# Altium PCB Smart_MCU.PcbDoc
Units mm, origin at the board's own origin, x right, y up, seen from the top; angles counter-clockwise.
Board outline 55.6 x 47.47 mm, 4 copper layers (Top Layer, GND_layer, 3.3V_layer, Bottom Layer), stack 0.603 mm thick; 88 components, 43 nets, 255 pads, 85 vias.
Unrouted connection lines stored in the file: 3.
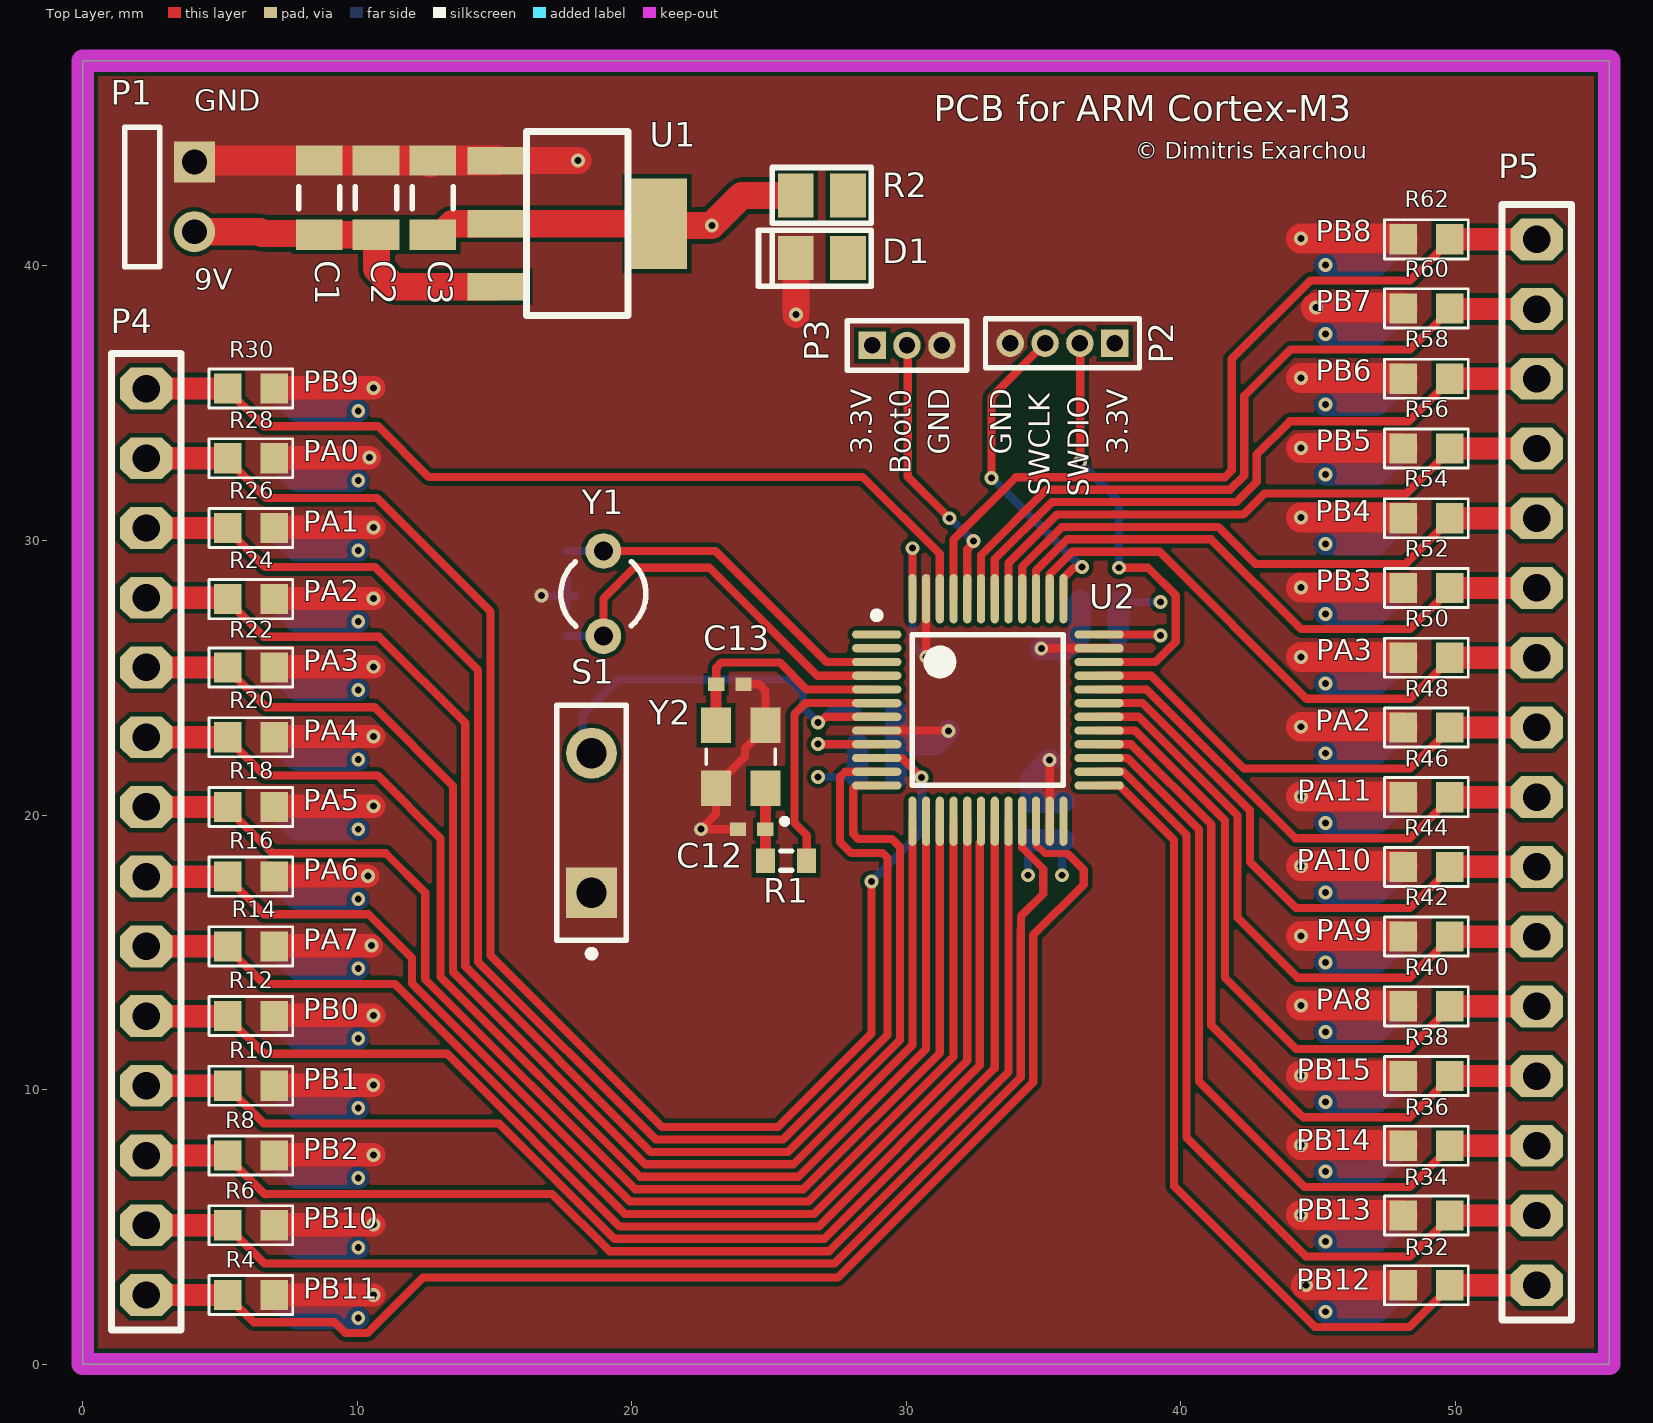
[diagram p0: Top Layer view]
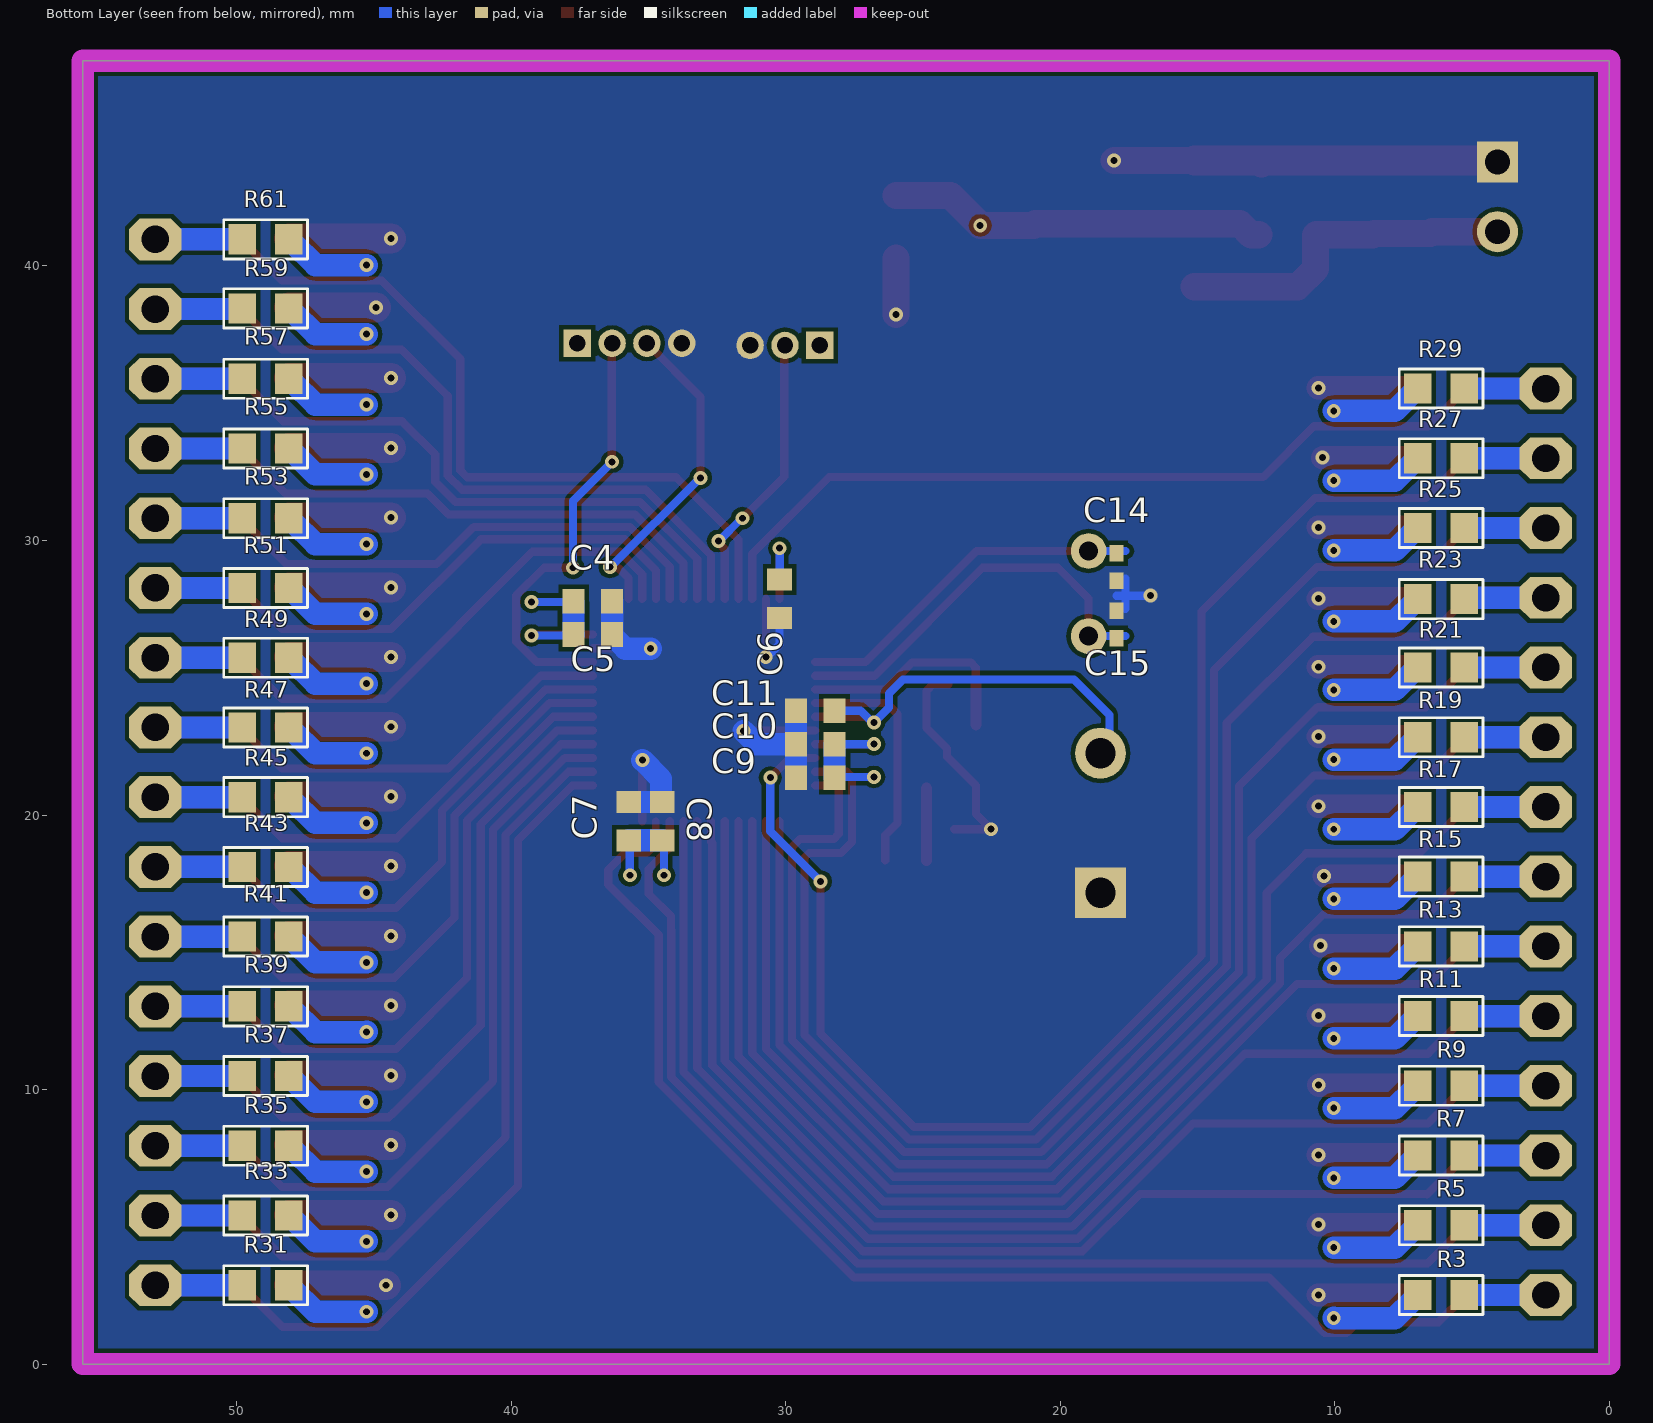
[diagram p1: Bottom Layer view, seen from below]
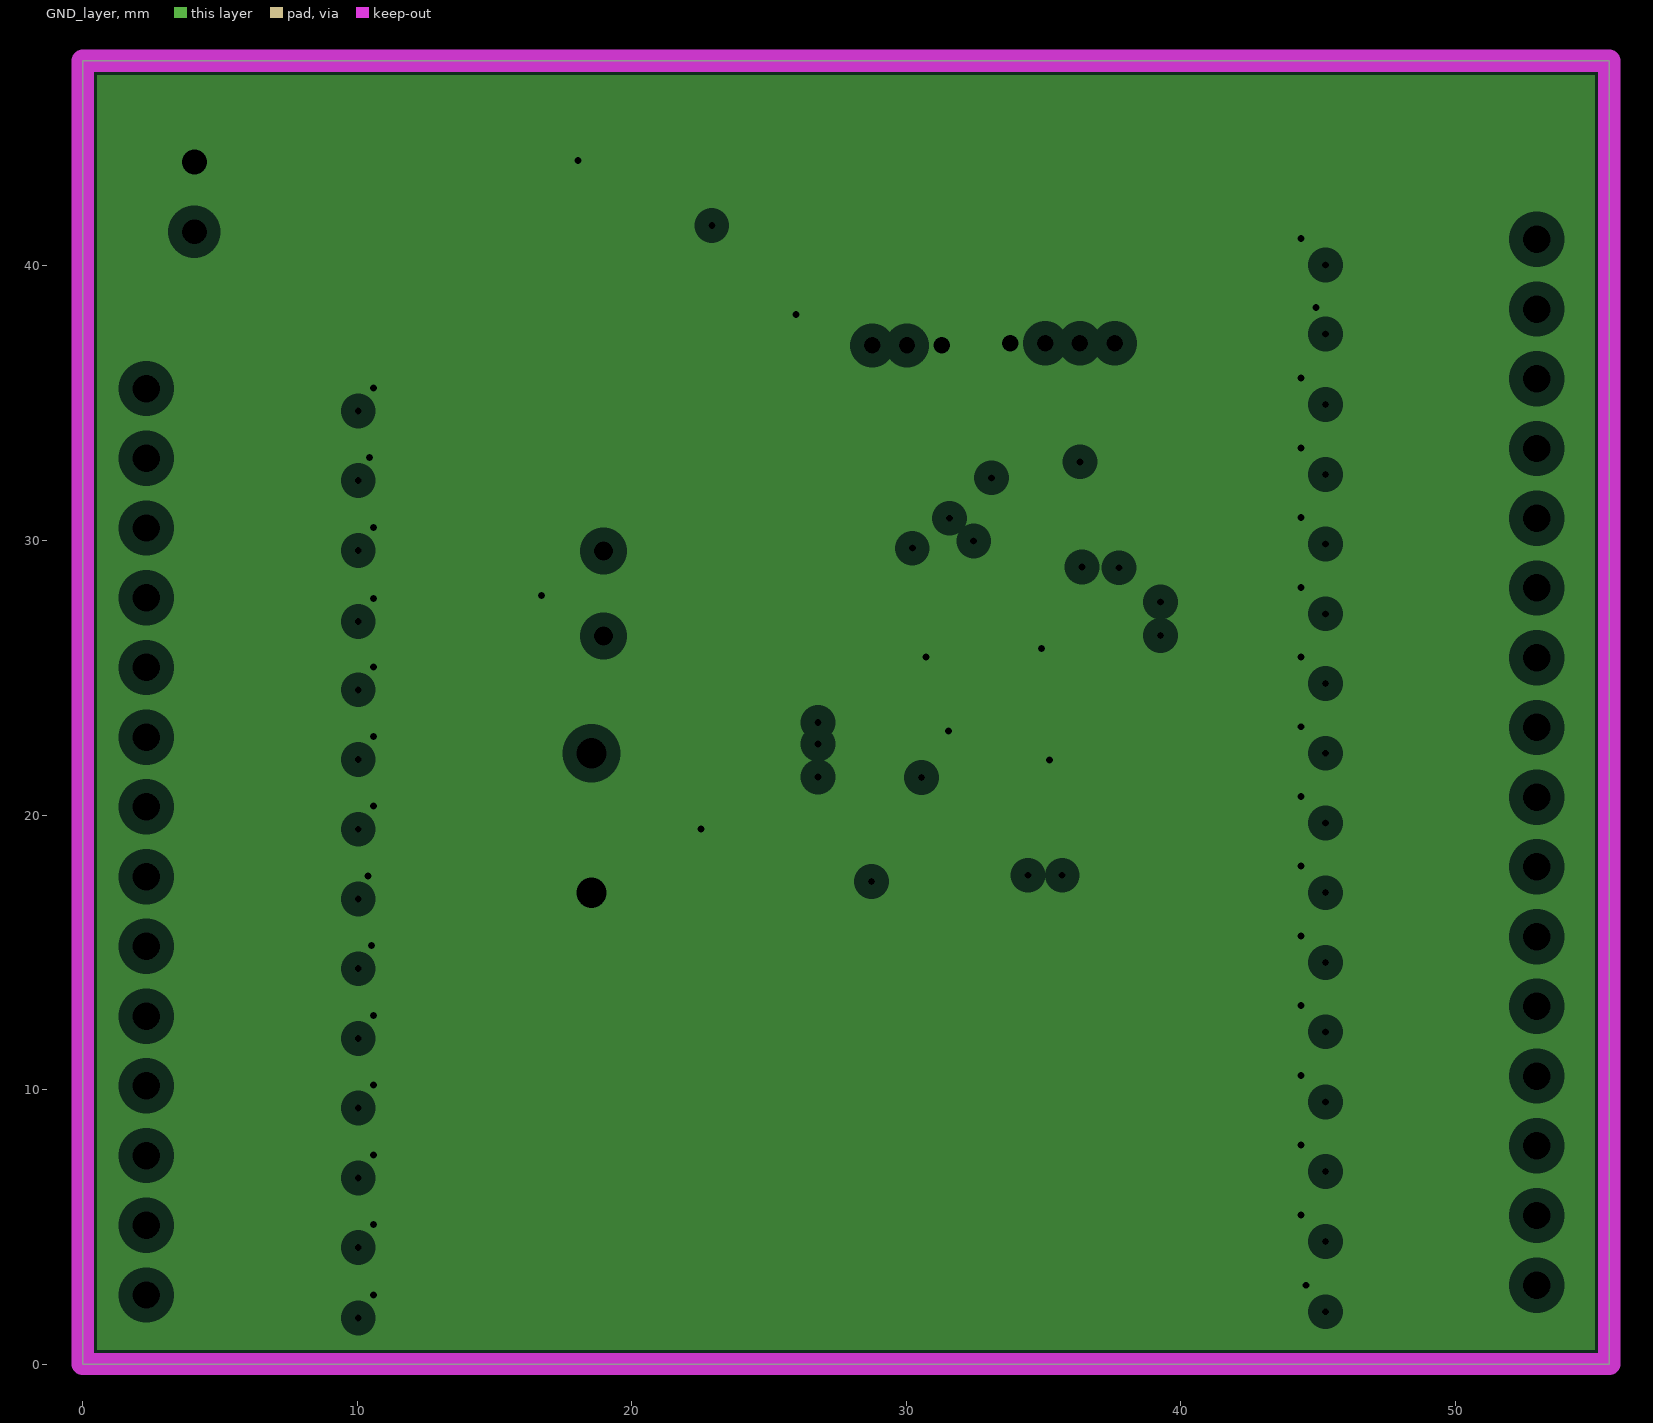
[diagram p2: GND_layer, clearances drawn from the general rule]
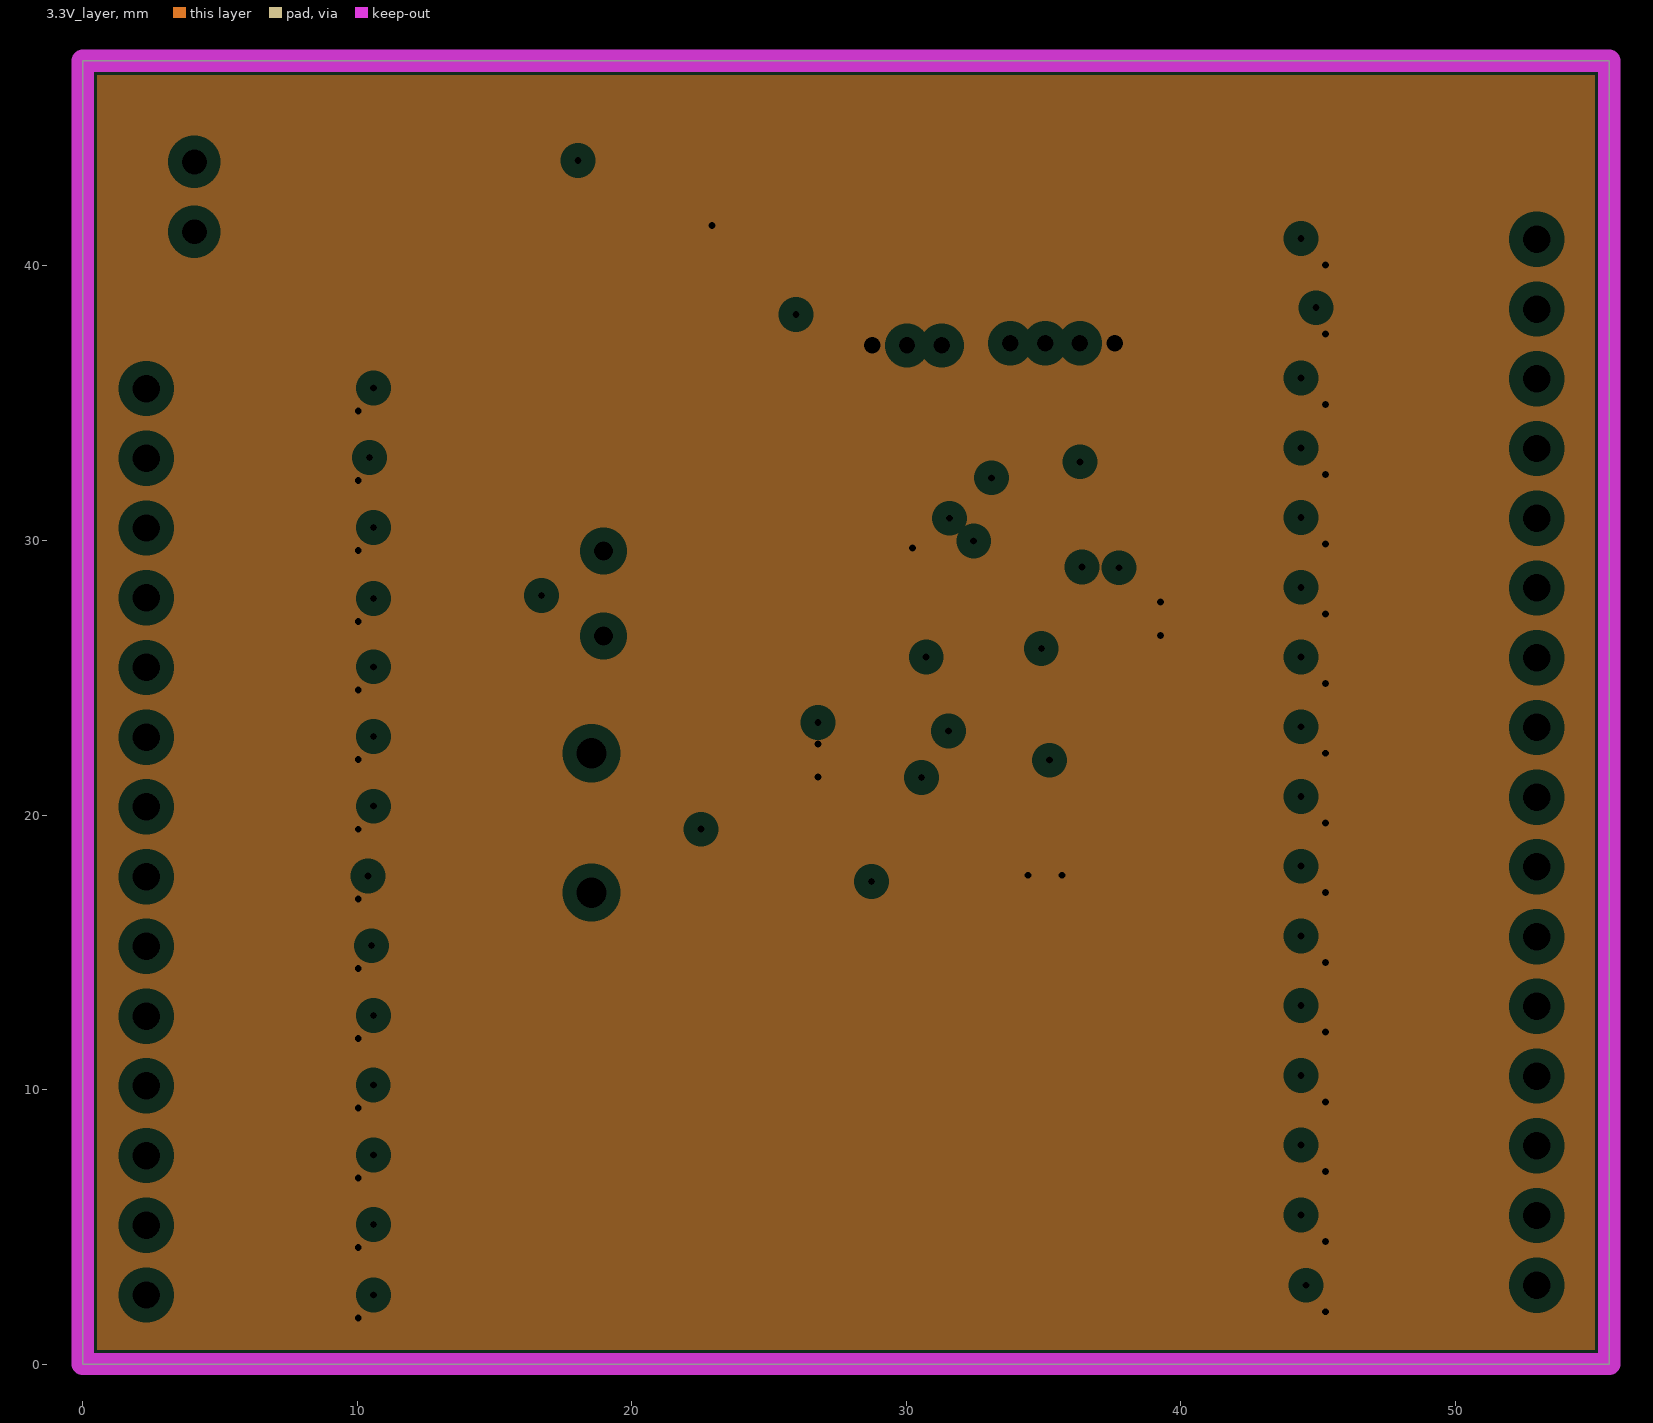
[diagram p3: 3.3V_layer, clearances drawn from the general rule]
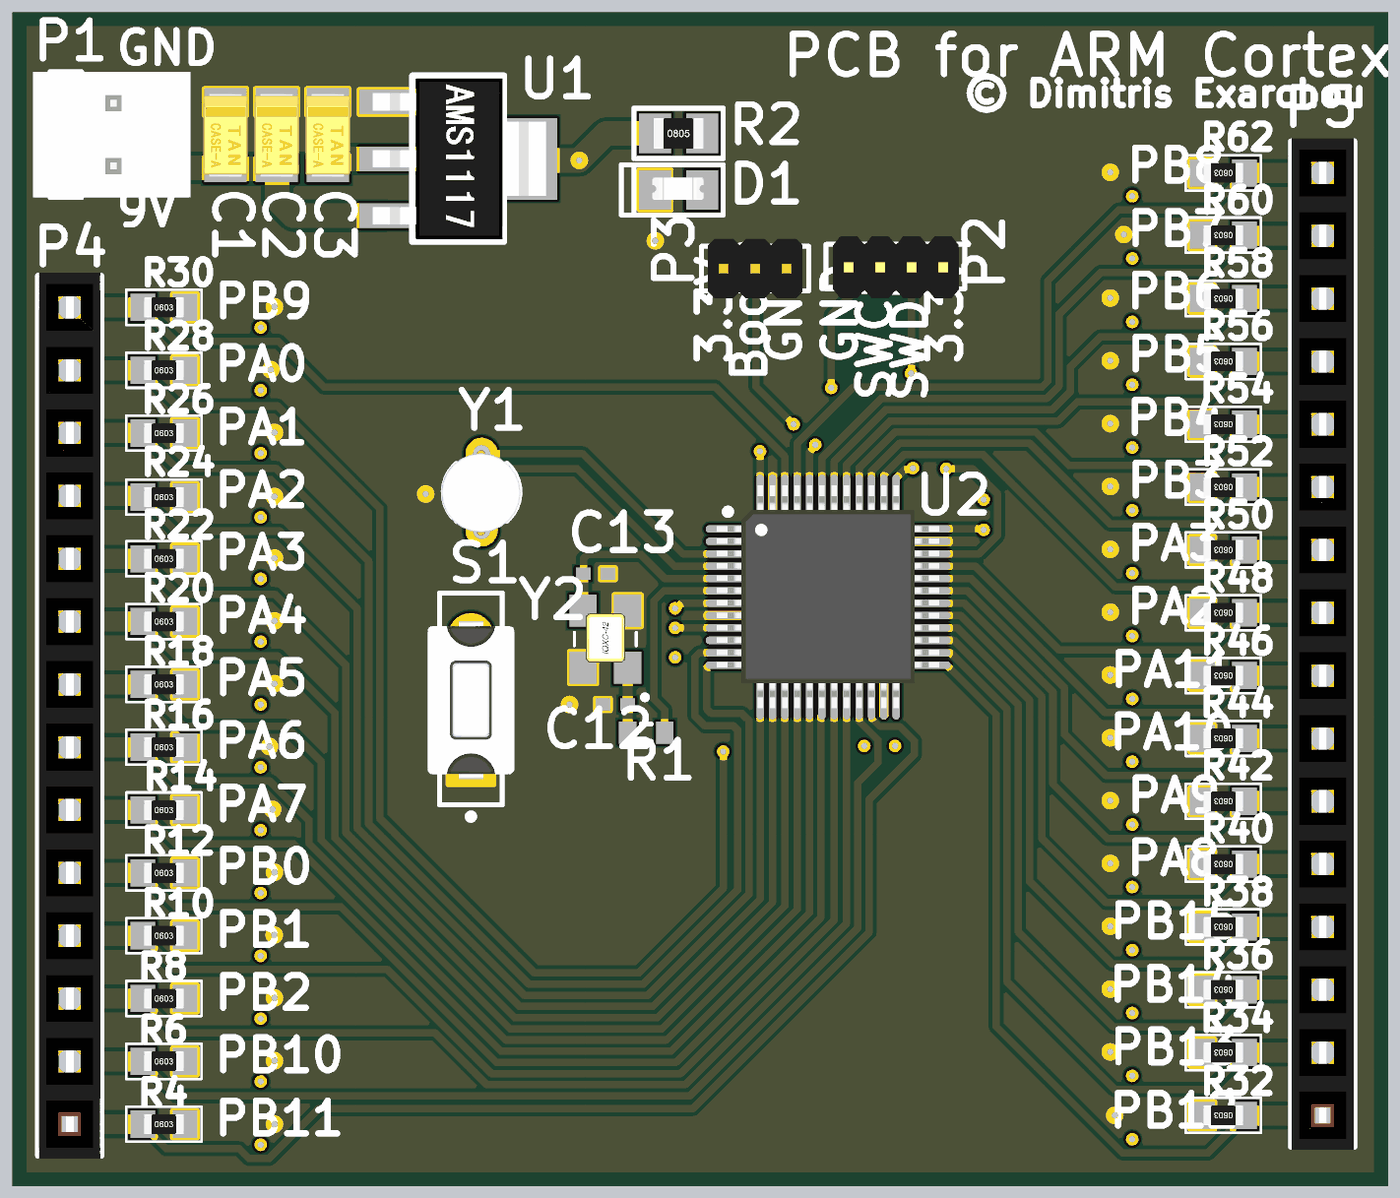
[diagram p4: 3D render of the assembled board from above, using the file's embedded part models]
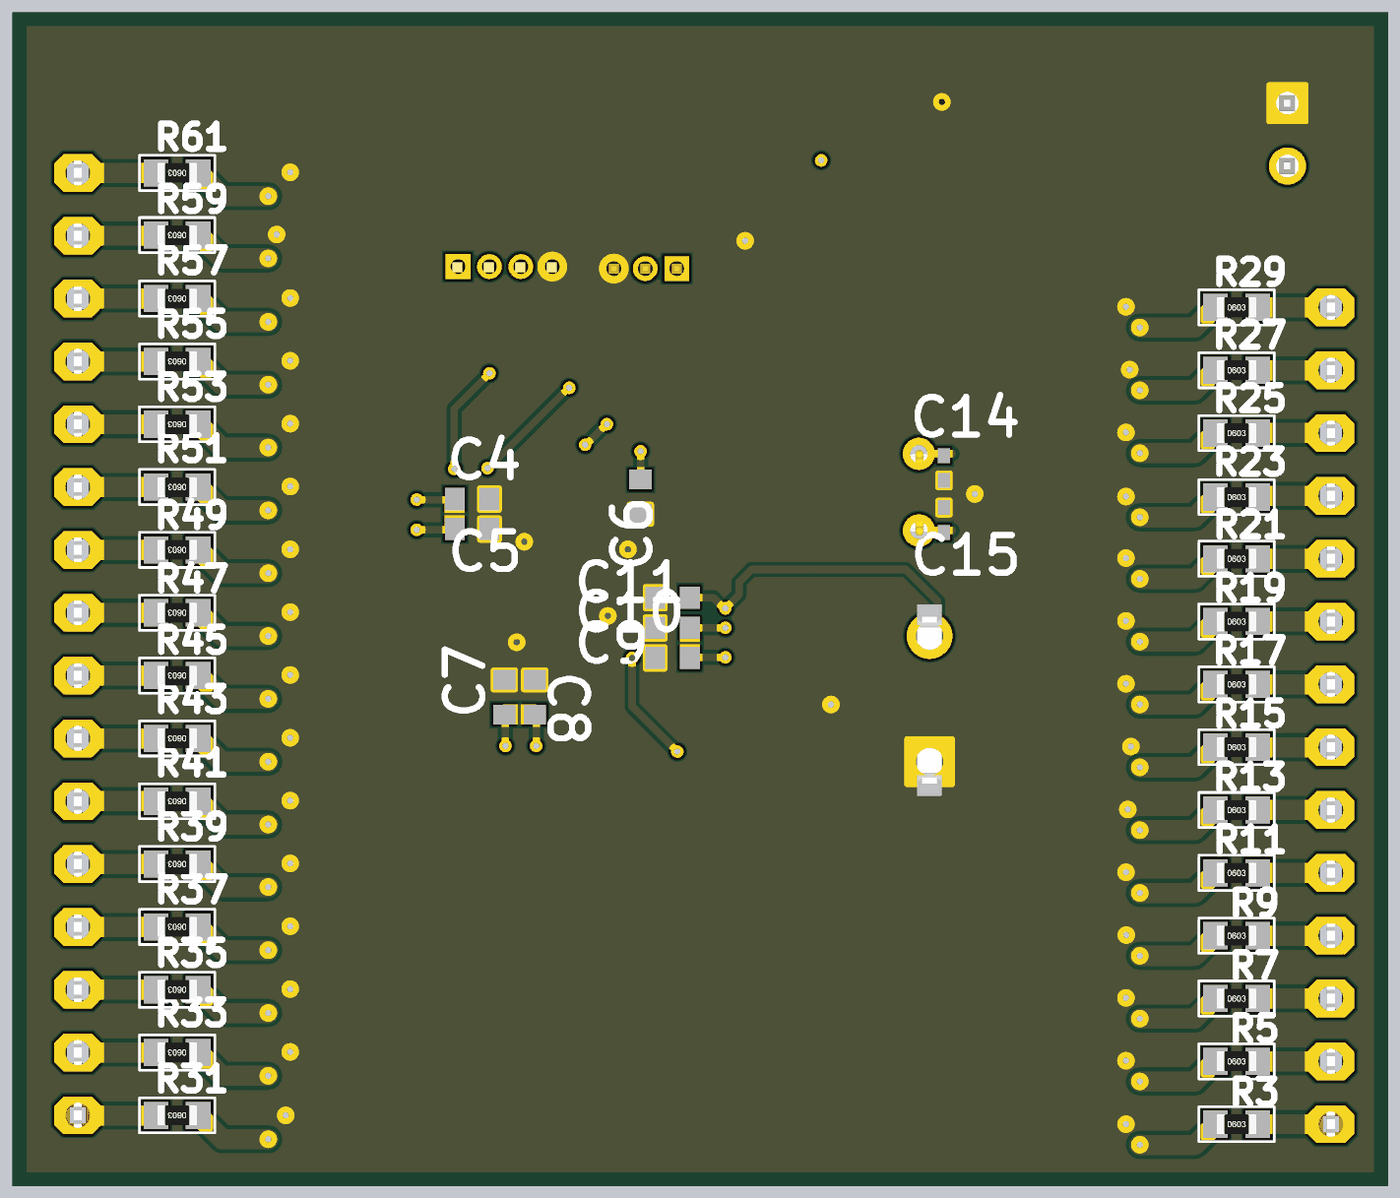
[diagram p5: 3D render of the assembled board from below, using the file's embedded part models]

## Layer stack, top to bottom
Top Solder: solder mask 0.0102, Solder Resist, Dk 3.5
Top Layer: signal copper 0.0356
Dielectric 2: prepreg 0.0711, PP-006, Dk 4.1
GND_layer: plane copper 0.035, net GND
Dielectric 1: dielectric 0.32, FR-4, Dk 4.8
3.3V_layer: plane copper 0.035, net +3.3V
Dielectric 3: prepreg 0.0711, PP-006, Dk 4.1
Bottom Layer: signal copper 0.0356
Bottom Solder: solder mask 0.0102, Solder Resist, Dk 3.5

## Board outline
0,0 0,47.473 55.601,47.473 55.601,0

## Design rules (kind name [scope] priority, off if disabled: settings)
Clearance [All] p1: gap=0.152 ignorepadtopadclearanceinfootprint=FALSE
ComponentClearance IGNORE [InComponent('Y2') vs InComponent('C12')] p1: gap=0.254 collisioncheckmode=3 verticalgap=0.254 showdistances=FALSE donotcheckwithout3dbody=TRUE
ComponentClearance ComponentClearance_1 [All] p2: gap=0.254 collisioncheckmode=3 verticalgap=0.254 showdistances=FALSE
PlaneClearance [All] p1: clearance=0.508
PlaneConnect [All] p1: planeconnectstyle=Direct reliefexpansion=0.508 reliefentries=4 reliefconductorwidth=0.254 reliefairgap=0.254
PolygonConnect [All] p1: connectstyle=Direct reliefconductorwidth=0.254 reliefentries=4 polygonreliefangle="90 Angle" airgapwidth=0.254
RoutingVias [All] p1: holewidth=0.254 width=0.508 viastyle="Through Hole" minholewidth=0.254 minwidth=0.508 maxholewidth=0.711 maxwidth=1.27
SilkToSilkClearance [All] p1: silktosilkclearance=0.102
SolderMaskExpansion [All] p1: expansion=0.102 istentingtop=FALSE
Width [All] p1: maxlimit=1.092 minlimit=0.254 preferedwidth=0.254
26 further rules are at their usual default settings.

## Classes and differential pairs
component class MCU: C4 C5 C6 C7 C8 C9 C10 C11 C12 C13 C14 C15 P2 P3 P4 P5 R1 R3 R4 R5 R6 R7 R8 R9 R10 R11 R12 R13 R14 R15 R16 R17 R18 R19 R20 R21 R22 R23 R24 R25 R26 R27 R28 R29 R30 R31 R32 R33 R34 R35 R36 R37 R38 R39 R40 R41 R42 R43 R44 R45 R46 R47 R48 R49 R50 R51 R52 R53 R54 R55 R56 R57 R58 R59 R60 R61 R62 S1 U2 Y1 Y2
component class PowerSupply: C1 C2 C3 D1 P1 R2 U1

## Components (designator, comment, footprint, x,y, rotation, side; value= is the part's Value field where it differs from the comment)
C1 "tantalum cap" C1206tancap 8.611,42.49 r270 top value=100nF
C2 "tantalum cap" C1206tancap 10.681,42.49 r270 top value=10uF
C3 "tantalum cap" C1206tancap 12.751,42.49 r270 top value=100uF
C4 "Cap Semi" 1608[0603] 37.019,27.788 r0 bottom value=100nF
C5 "Cap Semi" 1608[0603] 37.019,26.575 r0 bottom value=100nF
C6 "Cap Semi" 1608[0603] 30.219,27.875 r90 bottom value=100nF
C7 "Cap Semi" 1608[0603] 34.493,19.775 r270 bottom value=100nF
C8 "Cap Semi" 1608[0603] 35.719,19.775 r270 bottom value=4.7uF
C9 "Cap Semi" 1608[0603] 28.919,21.361 r180 bottom value=10nF
C10 "Cap Semi" 1608[0603] 28.919,22.575 r180 bottom value=1uF
C11 "Cap Semi" 1608[0603] 28.919,23.8 r180 bottom value=100nF
C12 "Cap Semi" 0402 24.366,19.482 r0 top value=10pF
C13 "Cap Semi" 0402 23.566,24.765 r180 top value=10pF
C14 "Cap Semi" 0402 17.947,29.041 r90 bottom value=10pF
C15 "Cap Semi" 0402 17.947,26.941 r270 bottom value=10pF
D1 "LED" MY_LED_0805 26.924,40.361 r0 top
P1 "Battery Connection 9V" HDR1X2H3dbody 4.064,43.79 r270 top
P2 "MHDR1X4" MHDR1X4body 37.592,37.186 r180 top
P3 "MHDR1X3" MHDR1X3body 28.753,37.105 r0 top
P4 "Header 14" MY_FE14 2.311,19.025 r90 top
P5 "Header 16" MY_FE16 52.959,21.92 r90 top
R1 "Res3" J1-0603 25.616,18.339 r0 top value=10R
R2 "330R" MY_0805 26.924,42.57 r0 top
R3 "1K" MY_0603 6.121,2.515 r180 bottom
R4 "1K" MY_0603 6.121,2.515 r0 top
R5 "1K" MY_0603 6.121,5.055 r180 bottom
R6 "1K" MY_0603 6.121,5.055 r0 top
R7 "1K" MY_0603 6.121,7.595 r180 bottom
R8 "1K" MY_0603 6.121,7.595 r0 top
R9 "1K" MY_0603 6.121,10.135 r180 bottom
R10 "1K" MY_0603 6.121,10.135 r0 top
R11 "1K" MY_0603 6.121,12.675 r180 bottom
R12 "1K" MY_0603 6.121,12.675 r0 top
R13 "1K" MY_0603 6.121,15.215 r180 bottom
R14 "1K" MY_0603 6.121,15.215 r0 top
R15 "1K" MY_0603 6.121,17.755 r180 bottom
R16 "1K" MY_0603 6.121,17.755 r0 top
R17 "1K" MY_0603 6.121,20.295 r180 bottom
R18 "1K" MY_0603 6.121,20.295 r0 top
R19 "1K" MY_0603 6.121,22.835 r180 bottom
R20 "1K" MY_0603 6.121,22.835 r0 top
R21 "1K" MY_0603 6.121,25.375 r180 bottom
R22 "1K" MY_0603 6.121,25.375 r0 top
R23 "1K" MY_0603 6.121,27.864 r180 bottom
R24 "1K" MY_0603 6.121,27.864 r0 top
R25 "1K" MY_0603 6.121,30.455 r180 bottom
R26 "1K" MY_0603 6.121,30.455 r0 top
R27 "1K" MY_0603 6.121,32.995 r180 bottom
R28 "1K" MY_0603 6.121,32.995 r0 top
R29 "1K" MY_0603 6.121,35.535 r180 bottom
R30 "1K" MY_0603 6.121,35.535 r0 top
R31 "1K" MY_0603 48.946,2.87 r0 bottom
R32 "1K" MY_0603 48.946,2.87 r180 top
R33 "1K" MY_0603 48.946,5.41 r0 bottom
R34 "1K" MY_0603 48.946,5.41 r180 top
R35 "1K" MY_0603 48.946,7.95 r0 bottom
R36 "1K" MY_0603 48.946,7.95 r180 top
R37 "1K" MY_0603 48.946,10.49 r0 bottom
R38 "1K" MY_0603 48.946,10.49 r180 top
R39 "1K" MY_0603 48.946,13.03 r0 bottom
R40 "1K" MY_0603 48.946,13.03 r180 top
R41 "1K" MY_0603 48.946,15.57 r0 bottom
R42 "1K" MY_0603 48.946,15.57 r180 top
R43 "1K" MY_0603 48.946,18.11 r0 bottom
R44 "1K" MY_0603 48.946,18.11 r180 top
R45 "1K" MY_0603 48.946,20.65 r0 bottom
R46 "1K" MY_0603 48.946,20.65 r180 top
R47 "1K" MY_0603 48.946,23.19 r0 bottom
R48 "1K" MY_0603 48.946,23.19 r180 top
R49 "1K" MY_0603 48.946,25.73 r0 bottom
R50 "1K" MY_0603 48.946,25.73 r180 top
R51 "1K" MY_0603 48.946,28.27 r0 bottom
R52 "1K" MY_0603 48.946,28.27 r180 top
R53 "1K" MY_0603 48.946,30.81 r0 bottom
R54 "1K" MY_0603 48.946,30.81 r180 top
R55 "1K" MY_0603 48.946,33.35 r0 bottom
R56 "1K" MY_0603 48.946,33.35 r180 top
R57 "1K" MY_0603 48.946,35.89 r0 bottom
R58 "1K" MY_0603 48.946,35.89 r180 top
R59 "1K" MY_0603 48.946,38.456 r0 bottom
R60 "1K" MY_0603 48.946,38.456 r180 top
R61 "1K" MY_0603 48.946,40.97 r0 bottom
R62 "1K" MY_0603 48.946,40.97 r180 top
S1 "SW-PB" SPST-2_body 18.531,19.71 r90 top
U1 "" "4-Pin SOT" 18.013,38.19 r270 top
U2 "" STM-LQFP48_N 32.969,23.825 r0 top
Y1 "XTAL" 32768 18.963,28.067 r0 top
Y2 "ECS-80-12-33-JGN-TR" 8MHZCrystall 23.966,22.123 r90 top

## Footprints (in the part's own frame and the unit in brackets; to place one, negate y for a bottom-side part, rotate by r counter-clockwise, add the part's x,y. Pads: shape width x height; smd on the part's side, far side on the other; paste and mask are expansions set on the pad)
"4-Pin SOT" [mm]
  rect 1x2.2 smd: 0(-1.05,-2.9) 1(-5.65,-2.9) 2(-3.35,-2.9)
  rect 3.3x2.2 smd: 2(-3.35,2.9)
  silkscreen extent -6.71,-1.85 0,1.85, body extent -6.6,-3.45 -0.1,3.55, height 1.61
8MHZCrystall [mm]
  rect 1.3x1.1 smd: 1(-1.15,-0.9) 2(1.15,-0.9) 3(1.15,0.9) 4(-1.15,0.9)
  silkscreen extent -2.45,-1.7 0.27,1.25, body extent -0.95,-0.8 1.05,0.8, height 0.49
0402 [mm] "Chip Capacitor, Body 1.0x0.5mm, IPC High Density"
  rect 0.6x0.5 smd: 1(-0.5,0) 2(0.5,0)
  body extent -0.55,-0.3 0.55,0.3, height 1.3
1608[0603] [mm] "Chip Capacitor, Body 1.6x0.8mm, IPC High Density"
  rect 0.8x0.9 smd: 1(-0.7,0) 2(0.7,0)
  body extent -0.87,-0.48 0.87,0.48, height 1.3
32768 [mm]
  round 1.3 hole 0.7: 1(0,1.55) 2(0,-1.55)
  silkscreen extent -1.55,-1.19 1.55,1.17, body extent -1.63,-1.75 1.57,1.7, height 9.54
C1206tancap [mm]
  rect 1.1x1.7 smd: 1(-1.35,0) 2(1.35,0)
  silkscreen extent -0.4,-0.75 0.4,0.75, body extent -1.7,-0.9 1.7,0.9, height 1.8
HDR1X2H3dbody [mm]
  rect 1.5x1.5 hole 0.9: 1(0,0)
  round 1.5 hole 0.9: 2(2.54,0)
  silkscreen extent -1.27,-2.54 3.81,-1.27, body extent -1.27,-3.23 3.81,3.12, height 11.19
J1-0603 [mm] "Chip Resistor, Body 1.6x0.8mm, IPC High Density"
  rect 0.7x0.9 smd: 1(-0.75,0) 2(0.75,0)
  silkscreen extent -0.2,-0.35 0.2,0.35, body extent -0.85,-0.48 0.85,0.48, height 0.9
MHDR1X3body [mm]
  rect 1x1 hole 0.6: 1(0,0)
  round 1 hole 0.6: 2(1.27,0) 3(2.54,0)
  silkscreen extent -0.9,-0.9 3.44,0.9, body extent -0.64,-1.2 3.17,1.2, height 5
MHDR1X4body [mm]
  rect 1x1 hole 0.6: 1(0,0)
  round 1 hole 0.6: 2(1.27,0) 3(2.54,0) 4(3.81,0)
  silkscreen extent -0.9,-0.9 4.71,0.9, body extent -0.66,-1.22 4.42,1.28, height 4.61
MY_0603 [mm]
  rect 1x1.1 smd: 1(-0.85,0) 2(0.85,0)
  silkscreen extent -1.52,-0.71 1.52,0.71, body extent -0.8,-0.4 0.8,0.4, height 0.44
MY_0805 [mm]
  rect 1.3x1.6 smd: 1(-0.95,0) 2(0.95,0)
  silkscreen extent -1.8,-1.02 1.8,1.02, body extent -1,-0.62 1,0.63, height 0.59
MY_FE14 [mm]
  oct 1.524x1.905 hole 1: 1(-16.51,0) 2(-13.97,0) 3(-11.43,0) 4(-8.89,0) 5(-6.35,0) 6(-3.81,0) 7(-1.27,0) 8(1.27,0) 9(3.81,0) 10(6.35,0) 11(8.89,0) 12(11.43,0) 13(13.97,0) 14(16.51,0)
  silkscreen extent -17.78,-1.27 17.78,1.27, body extent -17.9,-1.25 17.91,1.25, height 8.5
MY_FE16 [mm]
  oct 1.524x1.905 hole 1: 1(-19.05,0) 2(-16.51,0) 3(-13.97,0) 4(-11.43,0) 5(-8.89,0) 6(-6.35,0) 7(-3.81,0) 8(-1.27,0) 9(1.27,0) 10(3.81,0) 11(6.35,0) 12(8.89,0) 13(11.43,0) 14(13.97,0) 15(16.51,0) 16(19.05,0)
  silkscreen extent -20.32,-1.27 20.32,1.27, body extent -20.44,-1.25 20.45,1.25, height 8.5
MY_LED_0805 [mm]
  rect 1.3x1.6 smd: A(0.95,-0.076) K(-0.95,-0.076)
  silkscreen extent -2.31,-1.09 1.8,0.94, body extent -1.06,-0.48 1.01,0.42, height 0.86
SPST-2_body [mm]
  rect 1.85x1.85 hole 1.1: 1(-2.54,0)
  round 1.85 hole 1.1: 2(2.54,0)
  silkscreen extent -4.89,-1.27 4.28,1.27, body extent -3.93,-1.75 3.83,1.75, height 5.25
STM-LQFP48_N [mm]
  oval 1.8x0.3 smd: 1(-4.05,2.75) 2(-4.05,2.25) 3(-4.05,1.75) 4(-4.05,1.25) 5(-4.05,0.75) 6(-4.05,0.25) 7(-4.05,-0.25) 8(-4.05,-0.75) 9(-4.05,-1.25) 10(-4.05,-1.75) 11(-4.05,-2.25) 12(-4.05,-2.75) 25(4.05,-2.75) 26(4.05,-2.25) 27(4.05,-1.75) 28(4.05,-1.25) 29(4.05,-0.75) 30(4.05,-0.25) 31(4.05,0.25) 32(4.05,0.75) 33(4.05,1.25) 34(4.05,1.75) 35(4.05,2.25) 36(4.05,2.75)
  oval 0.3x1.8 smd: 13(-2.75,-4.05) 14(-2.25,-4.05) 15(-1.75,-4.05) 16(-1.25,-4.05) 17(-0.75,-4.05) 18(-0.25,-4.05) 19(0.25,-4.05) 20(0.75,-4.05) 21(1.25,-4.05) 22(1.75,-4.05) 23(2.25,-4.05) 24(2.75,-4.05) 37(2.75,4.05) 38(2.25,4.05) 39(1.75,4.05) 40(1.25,4.05) 41(0.75,4.05) 42(0.25,4.05) 43(-0.25,4.05) 44(-0.75,4.05) 45(-1.25,4.05) 46(-1.75,4.05) 47(-2.25,4.05) 48(-2.75,4.05)
  silkscreen extent -4.17,-2.75 2.75,3.57, body extent -4.5,-4.49 4.5,4.51, height 1.56

## Part data
C1 C3: library part "Cap Semi_6", "Capacitor (Semiconductor SIM Model)", LatestRevisionDate=29-May-2009, LatestRevisionNote="IPC-7351 Footprint Added.", PackageDescription="Chip Capacitor", PackageReference=C1206, Published=8-Jun-2000, Publisher="Altium Limited"
C2: library part "Cap Semi_5", "Capacitor (Semiconductor SIM Model)", LatestRevisionDate=29-May-2009, LatestRevisionNote="IPC-7351 Footprint Added.", PackageDescription="Chip Capacitor", PackageReference=C1206, Published=8-Jun-2000, Publisher="Altium Limited"
C4 C5 C6 C7 C8 C9 C10 C11 C12 C13 C14 C15: "Capacitor (Semiconductor SIM Model)", LatestRevisionDate=29-May-2009, LatestRevisionNote="IPC-7351 Footprint Added.", PackageDescription="Chip Capacitor", PackageReference=C1206, Published=8-Jun-2000, Publisher="Altium Limited"
D1: "Typical INFRARED GaAs LED", ASiD Part Number=LED-AS
P1: library part "Header 2H", "Header, 2-Pin, Right Angle", Voltage=9V, LatestRevisionDate=17-Jul-2002, LatestRevisionNote="Re-released for DXP Platform.", Publisher="Altium Limited"
P2: "Header, 4-Pin", LatestRevisionDate=17-Jul-2002, LatestRevisionNote="Re-released for DXP Platform.", Publisher="Altium Limited"
P3: "Header, 3-Pin", LatestRevisionDate=17-Jul-2002, LatestRevisionNote="Re-released for DXP Platform.", Publisher="Altium Limited"
P4: "Header, 14-Pin", ASiD Part Number="Header 14-AS"
P5: "Header, 16-Pin", ASiD Part Number="Header 16-AS"
R1: "Resistor", LatestRevisionDate=29-May-2009, LatestRevisionNote="IPC-7351 Footprint Added.", PackageDescription="Chip Resistor", PackageReference=J1-0603, Published=8-Jun-2000, Publisher="Altium Limited"
R2 R3 R4 R5 R6 R7 R8 R9 R10 R11 R12 R13 R14 R15 R16 R17 R18 R19 R20 R21 R22 R23 R24 R25 R26 R27 R28 R29 R30 R31 R32 R33 R34 R35 R36 R37 R38 R39 R40 R41 R42 R43 R44 R45 R46 R47 R48 R49 R50 R51 R52 R53 R54 R55 R56 R57 R58 R59 R60 R61 R62: library part Res, "Standard resistor", ASiD Part Number=Res-AS
S1: "Switch", LatestRevisionDate=17-Jul-2002, LatestRevisionNote="Re-released for DXP Platform.", PackageDescription="Switch; 2 Leads", PackageReference=SPST-2, Published=24-Mar-1999, Publisher="Altium Limited"
U1: library part lm1117, "The LM1117 is a low dropout voltage regulator with a dropout of 1.2 V at 800 mA of load current. The LM1117 is available in an adjustable version, which can set the output voltage from 1.25 V to 13.8 V with only two external resistors. In addition, the device is available in five fixed voltages, 1.8 V, 2.5 V, 3.3 V, and 5 V. The LM1117 offers current limiting and thermal shutdown. The circuit includes a Zener trimmed bandgap reference to assure output voltage accuracy to within ±1%. A minimum of 10-μF tantalum capacitor is required at the output to improve the transient response and stability.", Output Voltage=3.3V, ComponentLink1Description=datasheet, ComponentLink1URL=https://www.ti.com/lit/ds/symlink/lm1117.pdf?ts=1680684089578
U2: library part STM32F103C8T6, "ARM Cortex-M3 32-bit MCU, 64 KB Flash, 20 KB Internal RAM, 37 I/Os, 48-pin LQFP, -40 to 85 degC, Tray", I/Os (High Current)=37, Operating Frequency(F) (Processor speed) (MHz)=72, Supplier Part Number 1=497-6063-ND, Supply Voltage(Vcc) min (V)=2, A/D Converter="2x12-bit (10 Channel)", ComponentLink1Description="Manufacturer URL", ComponentLink1URL=http://www.st.com/web/en/home.html, ComponentLink2Description=Datasheet, ComponentLink2URL=http://www.st.com/st-web-ui/static/active/en/resource/technical/document/datasheet/CD00161566.pdf, ComponentLink3Description="Package Specification", ComponentLink3URL=http://www.st.com/st-web-ui/static/active/en/resource/technical/document/datasheet/DM00058181.pdf, Core="ARM Cortex-M3", DatasheetVersion="Rev. 16", FLASH Size (Prog) (kB)=64, Internal RAM Size (kB)=20, Mounting Technology="Surface Mount", PackageDescription="48-Pin Low Profile Quad Flat Package, 7 x 7 mm Body, 0.5 mm Pitch", PackageReference=LQFP48, PackageVersion="Rev. 6, 06/2013", Packing=Tray, PartNumber=STM32F103C8T6, Supplier 1=Digi-Key, Supplier 2=Farnell, Supplier 3=Newark, Supplier 4=Newark, Supplier 5=Mouser, Supplier Part Number 2=1447637, Supplier Part Number 3=59M2182, Supplier Part Number 4=57P1222, Supplier Part Number 5=511-STM32F103C8T6
Y1: "Crystal Oscillator", LatestRevisionDate=17-Jul-2002, LatestRevisionNote="Re-released for DXP Platform.", PackageDescription="Crystal, Thru-Hole; 2 Leads; Body 3.1 x 8.2 mm (Dia.xH)", PackageReference=R38, Published=8-Jun-2000, Publisher="Altium Limited"
Y2: "8MHz Â±20ppm Crystal 12pF 400 Ohms 4-SMD, No Lead", Package="SMD-4 ECS International", Availability=Warning, BuyPart=https://www.snapeda.com/parts/ECS-80-12-33-JGN-TR/ECS%20Inc./view-part/4477300/?ref=eda, MF="ECS Inc.", Mouser-Purchase-URL=https://snapeda.com/shop?store=Mouser&id=4477300, MP=ECS-80-12-33-JGN-TR, Price=None, SnapEDA_Link=https://www.snapeda.com/parts/ECS-80-12-33-JGN-TR/ECS%20Inc./view-part/4477300/?ref=snap

## Via types
v1: diameter 0.508, hole 0.254, Top Layer to Bottom Layer, 85 vias

## Nets (pads, with @x,y where several pads share a name; then routed paths per layer and width w, separated by ;. In a path a pad name is that pad's centre, name@x,y a point inside that pad or via, vN(x,y) a via of type N, cw(c..) or ccw(c..) an arc to the next point about the centre after c; other vN are vias at no path point)
"32KHz 01": C14.2 U2.3 Y1.1 | length 13
  Top Layer w0.3: Y1.1 23.051,29.617 27.093,25.575 U2.3
  Bottom Layer w0.3: 17.616,29.617 Y1.1
"32KHz 02": C15.2 U2.4 Y1.2 | length 14.8
  Top Layer w0.3: Y1.2 18.963,27.889 20.08,29.007 22.823,29.007 26.76,25.07 27.564,25.07 27.57,25.075 U2.4@28.919,25.075
  Bottom Layer w0.3: 17.616,26.517 Y1.2
+3.3V: C3.2 C4.2 C5.2 C6.2 C7.2 C8.2 C9.2 C10.2 P2.1 P3.1 R2.1 R3.1 R5.1 R7.1 R9.1 R11.1 R13.1 R15.1 R17.1 R19.1 R21.1 R23.1 R25.1 R27.1 R29.1 R31.1 R33.1 R35.1 R37.1 R39.1 R41.1 R43.1 R45.1 R47.1 R49.1 R51.1 R53.1 R55.1 R57.1 R59.1 R61.1 U1.2 U2.9 U2.24 U2.36 U2.48 | length 127.4
  Top Layer w0.3: v1(26.786,22.581) 27.523,22.581 27.528,22.575 U2.9 ; v1(30.215,29.718) 30.219,29.714 U2.48@30.219,27.875 ; U2.36 39.225,26.575 v1(39.257,26.543)
  Top Layer w0.991: C3.2 13.051,41.14 13.446,41.536 15.108,41.536 15.113,41.54 20.913,41.54 20.975,41.478 v1(22.911,41.478) 24.003,42.57 R2.1
  Bottom Layer w0.3: v1(26.786,21.387) 28.194,21.387 C9.2 ; v1(26.786,22.581) 28.214,22.581 C10.2 ; v1(30.215,29.718) 30.215,28.58 C6.2 ; v1(34.431,17.805) 34.431,19.013 C7.2 ; v1(35.676,17.805) 35.676,19.032 C8.2 ; C5.2 37.751,26.543 v1(39.257,26.543) ; C4.2@37.745,27.762 v1(39.257,27.762) v1@39.308,27.762
  Bottom Layer w0.813: C9.2 C10.2 ; C7.2 C8.2 ; C5.2 37.726,26.582 37.726,27.743 C4.2@37.745,27.762
  Bottom Layer w0.82: R3.1 6.971,2.465 7.061,2.375 7.111,2.375 7.81,1.676 10.026,1.676 v1(10.033,1.683) ; R5.1@7.111,4.94 7.81,4.241 v1(10.033,4.241) ; R7.1@7.111,7.48 7.81,6.781 v1(10.033,6.781) ; R9.1@7.111,10.02 7.81,9.321 v1(10.033,9.321) ; R11.1@7.111,12.56 7.81,11.861 v1(10.033,11.861) ; R13.1@7.111,15.1 7.81,14.401 v1(10.033,14.401) ; R15.1@7.111,17.64 7.81,16.941 v1(10.033,16.941) ; R17.1@7.111,20.18 7.81,19.481 v1(10.033,19.481) ; R19.1@7.111,22.72 7.81,22.021 v1(10.033,22.021) ; R21.1@7.111,25.26 7.81,24.561 v1(10.033,24.561) ; R23.1@7.111,27.749 7.81,27.051 v1(10.033,27.051) ; R25.1@7.111,30.34 7.81,29.641 v1(10.033,29.641) ; R27.1@7.111,32.88 7.81,32.181 v1(10.033,32.181) ; R29.1@7.111,35.42 7.81,34.721 v1(10.033,34.721) ; v1(45.263,1.905) 47.131,1.905 47.956,2.73 48.006,2.73 48.096,2.82 R31.1 ; v1(45.263,4.47) 47.131,4.47 R33.1@47.956,5.295 ; v1(45.263,7.01) 47.131,7.01 R35.1@47.956,7.835 ; v1(45.263,9.55) 47.131,9.55 R37.1@47.956,10.375 ; v1(45.263,12.103) 45.276,12.09 47.131,12.09 R39.1@47.956,12.915 ; v1(45.263,14.63) 47.131,14.63 R41.1@47.956,15.455 ; v1(45.263,17.17) 47.131,17.17 R43.1@47.956,17.995 ; v1(45.263,19.71) 47.131,19.71 R45.1@47.956,20.535 ; v1(45.263,22.25) 47.131,22.25 R47.1@47.956,23.075 ; v1(45.263,24.79) 47.131,24.79 R49.1@47.956,25.615 ; v1(45.263,27.33) 47.131,27.33 R51.1@47.956,28.155 ; v1(45.263,29.87) 47.131,29.87 R53.1@47.956,30.695 ; v1(45.263,32.41) 47.131,32.41 R55.1@47.956,33.235 ; v1(45.263,34.95) 47.131,34.95 R57.1@47.956,35.775 ; v1(45.263,37.515) 47.131,37.515 R59.1@47.956,38.341 ; v1(45.263,40.03) 47.131,40.03 R61.1@47.956,40.855
+9V: C1.2 C2.2 P1.2 U1.0 | length 12.5
  Top Layer w0.991: P1.2 6.448,41.25 6.517,41.18 ; 6.619,41.18 8.571,41.18 C1.2 C2.2 10.693,41.128 10.693,39.9 11.353,39.24 U1.0
BOOT0: P3.2 U2.44 | length 10.4
  Top Layer w0.3: P3.2 30.048,37.079 30.048,32.334 v1(31.572,30.81) ; U2.44 32.219,29.692 32.452,29.925 v1(32.452,29.981)
  Bottom Layer w0.3: v1(31.572,30.81) 31.598,30.81 32.427,29.981 v1(32.452,29.981)
GND: C1.1 C2.1 C3.1 C4.1 C5.1 C6.1 C7.1 C8.1 C9.1 C10.1 C11.1 C12.1 C13.1 C14.1 C15.1 D1.K P1.1 P2.4 P3.3 R4.2 R6.2 R8.2 R10.2 R12.2 R14.2 R16.2 R18.2 R20.2 R22.2 R24.2 R26.2 R28.2 R30.2 R32.2 R34.2 R36.2 R38.2 R40.2 R42.2 R44.2 R46.2 R48.2 R50.2 R52.2 R54.2 R56.2 R58.2 R60.2 R62.2 S1.1 U1.1 U2.8 U2.23 U2.35 U2.47 Y2.2 Y2.4 | length 156.9
  Top Layer w0.3: C12.1 v1(22.519,19.482) 23.066,20.03 23.066,21.073 24.119,22.126 24.119,22.426 24.866,23.173 24.866,24.525 24.627,24.765 C13.1 ; U2.8 31.524,23.075 v1(31.536,23.063) ; U2.47 30.719,25.759 v1(30.723,25.756) ; v1(34.914,26.06) 34.929,26.075 U2.35 ; U2.23 v1(35.219,21.996)
  Top Layer w0.85: R4.2 v1(10.592,2.515) ; R6.2@6.971,5.08 v1(10.592,5.08) ; R8.2@6.971,7.62 v1(10.592,7.62) ; R10.2@6.971,10.16 v1(10.58,10.16) ; R12.2@6.971,12.7 v1(10.592,12.7) ; R14.2@6.971,15.24 v1(10.518,15.24) ; R16.2@6.971,17.78 v1(10.39,17.78) ; R18.2@6.971,20.32 v1(10.592,20.32) ; R20.2@6.971,22.86 v1(10.592,22.86) ; R22.2@6.971,25.4 v1(10.592,25.4) ; R24.2@6.971,27.889 v1(10.592,27.889) ; R26.2@6.971,30.48 v1(10.592,30.48) ; R28.2@6.971,33.02 v1(10.442,33.02) ; R30.2@6.971,35.56 v1(10.592,35.56)
  Top Layer w0.991: U1.1 v1(18.034,43.84) ; D1.K 25.974,38.237 v1(25.984,38.227)
  Top Layer w1.092: P1.1@4.104,43.84 C1.1 C2.1 C3.1@12.671,43.84 ; C3.1@12.671,43.76 C3.1 U1.1 ; v1(44.374,5.435) R34.2@48.096,5.435 ; v1(44.374,7.975) R36.2@48.096,7.975 ; v1(44.374,10.515) R38.2@48.096,10.515 ; v1(44.374,13.055) R40.2@48.096,13.055 ; v1(44.374,15.595) R42.2@48.096,15.595 ; v1(44.374,18.135) R44.2@48.096,18.135 ; v1(44.374,20.675) R46.2@48.096,20.675 ; v1(44.374,23.215) R48.2@48.096,23.215 ; v1(44.374,25.755) R50.2@48.096,25.755 ; v1(44.374,28.295) R52.2@48.096,28.295 ; v1(44.374,30.835) R54.2@48.096,30.835 ; v1(44.374,33.375) R56.2@48.096,33.375 ; v1(44.374,35.915) R58.2@48.096,35.915 ; v1(44.374,40.995) R62.2@48.096,40.995 ; v1(44.558,2.87) R32.2 ; v1(44.922,38.481) R60.2@48.096,38.481
  Bottom Layer w0.3: v1(16.702,27.991) 17.616,27.991 ; 17.616,27.517 17.616,27.991 ; 17.616,28.617 17.616,27.991 ; 17.947,27.991 17.616,27.991 ; C6.1 30.219,26.208 30.672,25.756 v1(30.723,25.756)
  Bottom Layer w0.813: C9.1 C10.1 ; C11.1 C10.1 ; v1(31.536,23.063) 31.048,22.575 C10.1 ; C7.1 C7.1@34.53,20.475 ; v1(34.914,26.06) 35.842,26.06 36.319,26.538 C5.1 C4.1 ; v1(35.219,21.996) 34.537,21.315 34.537,20.482 C7.1@34.53,20.475 ; C8.1 C7.1@34.53,20.475
IN/OUT: C12.2 R1.1 Y2.1 | length 2.6
  Top Layer w0.406: R1.1 C12.2 Y2.1
NetD1_A: D1.A R2.2
NetR1_2: R1.2 U2.6 | length 8.7
  Top Layer w0.3: R1.2 26.366,19.266 25.922,19.71 25.922,23.673 26.329,24.079 27.247,24.079 27.251,24.075 U2.6
NRST: C11.2 S1.2 U2.7 | length 15.2
  Top Layer w0.3: v1(26.786,23.368) 26.842,23.368 27.049,23.575 U2.7
  Bottom Layer w0.3: S1.2@18.201,22.327 18.201,23.647 19.493,24.94 25.721,24.94 26.233,24.428 26.233,23.92 v1(26.786,23.368) 26.842,23.368 27.274,23.8 C11.2
OUT/IN: C13.2 U2.5 Y2.3 | length 8.4
  Top Layer w0.3: C13.2 23.066,24.854 23.077,24.865 23.077,25.377 23.253,25.552 25.389,25.552 26.366,24.575 U2.5
  Top Layer w0.406: Y2.3 C13.2
PA0: P4.13 R27.2 R28.1 U2.10 | length 60.3
  Top Layer w0.3: R28.1 5.271,32.945 6.669,31.547 10.719,31.547 14.851,27.415 14.851,14.884 21.105,8.631 25.317,8.631 28.727,12.042 v1(28.727,17.577) ; U2.10 29.842,22.075 v1(30.556,21.361)
  Top Layer w0.813: P4.13 R28.1
  Bottom Layer w0.3: v1(28.727,17.577) 30.556,19.406 v1(30.556,21.361)
  Bottom Layer w0.813: P4.13 R27.2
PA1: P4.12 R25.2 R26.1 U2.11 | length 59.2
  Top Layer w0.3: R26.1 5.271,30.405 6.644,29.032 10.643,29.032 14.399,25.276 14.399,14.653 20.873,8.179 25.504,8.179 29.315,11.99 29.315,18.443 29.139,18.618 27.991,18.618 27.584,19.025 27.584,21.387 27.773,21.575 U2.11@28.919,21.575
  Top Layer w0.813: P4.12 R26.1
  Bottom Layer w0.813: P4.12 R25.2
PA2: P4.11 R23.2 R24.1 U2.12 | length 57.2
  Top Layer w0.3: R24.1 5.271,27.814 6.593,26.492 10.795,26.492 13.934,23.353 13.934,14.478 20.686,7.727 25.691,7.727 29.767,11.802 29.767,18.838 29.479,19.126 28.245,19.126 28.067,19.304 28.067,20.973 28.169,21.075 U2.12
  Top Layer w0.813: P4.11 R24.1@5.271,27.915
  Bottom Layer w0.813: P4.11 R23.2@5.271,27.915
PA3: P4.10 R21.2 R22.1 U2.13 | length 52.3
  Top Layer w0.3: R22.1 5.271,25.325 6.669,23.927 10.617,23.927 13.482,21.062 13.482,14.285 20.493,7.275 25.879,7.275 30.219,11.615 U2.13
  Top Layer w0.813: P4.10 R22.1
  Bottom Layer w0.813: P4.10 R21.2
PA4: P4.9 R19.2 R20.1 U2.14 | length 51.2
  Top Layer w0.3: R20.1 5.271,22.785 6.618,21.438 10.744,21.438 13.03,19.152 13.03,14.098 20.306,6.822 26.066,6.822 30.719,11.476 U2.14
  Top Layer w0.813: P4.9 R20.1
  Bottom Layer w0.813: P4.9 R19.2
PA5: P4.8 R17.2 R18.1 U2.15 | length 50
  Top Layer w0.3: R18.1 5.271,20.245 6.909,18.607 11.035,18.607 12.471,17.17 12.471,14.017 20.118,6.37 26.253,6.37 31.219,11.336 U2.15
  Top Layer w0.813: P4.8 R18.1
  Bottom Layer w0.813: P4.8 R17.2
PA6: P4.7 R15.2 R16.1 U2.16 | length 48.6
  Top Layer w0.3: R16.1 5.271,17.705 6.591,16.385 10.401,16.385 11.989,14.797 11.989,13.861 19.931,5.918 26.44,5.918 31.719,11.197 U2.16
  Top Layer w0.813: P4.7 R16.1
  Bottom Layer w0.813: P4.7 R15.2
PA7: P4.6 R13.2 R14.1 U2.17 | length 48
  Top Layer w0.3: R14.1 5.271,15.165 6.591,13.845 11.365,13.845 19.744,5.466 26.628,5.466 32.219,11.058 U2.17
  Top Layer w0.813: P4.6 R14.1
  Bottom Layer w0.813: P4.6 R13.2
PA8: P5.5 R39.2 R40.1 U2.29 | length 27.9
  Top Layer w0.3: U2.29 38.327,23.075 41.605,19.797 41.605,14.072 44.196,11.481 48.296,11.481 49.796,12.98 R40.1
  Top Layer w0.813: R40.1 P5.5
  Bottom Layer w0.813: R39.2 P5.5
PA9: P5.6 R41.2 R42.1 U2.30 | length 25.9
  Top Layer w0.3: U2.30 38.466,23.575 42.057,19.984 42.057,16.261 44.245,14.074 48.349,14.074 49.796,15.52 R42.1
  Top Layer w0.813: R42.1 P5.6
  Bottom Layer w0.813: R41.2 P5.6
PA10: P5.7 R43.2 R44.1 U2.31 | length 23.9
  Top Layer w0.3: U2.31 38.606,24.075 42.52,20.161 42.52,18.288 44.194,16.614 48.349,16.614 49.796,18.06 R44.1
  Top Layer w0.813: R44.1 P5.7
  Bottom Layer w0.813: R43.2 P5.7
PA11: P5.8 R45.2 R46.1 U2.32 | length 22
  Top Layer w0.3: U2.32 38.745,24.575 44.167,19.154 48.349,19.154 49.796,20.6 R46.1
  Top Layer w0.813: R46.1 P5.8
  Bottom Layer w0.813: R45.2 P5.8
PA12: P5.9 R47.2 R48.1 U2.33 | length 21.2
  Top Layer w0.3: U2.33 38.907,25.075 42.289,21.694 48.349,21.694 49.796,23.14 R48.1
  Top Layer w0.813: R48.1 P5.9
  Bottom Layer w0.813: R47.2 P5.9
PA13: P5.10 R49.2 R50.1 U2.38 | length 25
  Top Layer w0.3: U2.38@35.219,27.875 35.219,28.765 36.045,29.591 39.218,29.591 44.575,24.234 48.349,24.234 49.796,25.68 R50.1
  Top Layer w0.813: R50.1 P5.10
  Bottom Layer w0.813: R49.2 P5.10
PB0: P4.5 R11.2 R12.1 U2.18 | length 47.9
  Top Layer w0.3: R12.1 5.271,12.625 6.591,11.305 13.265,11.305 19.557,5.014 26.815,5.014 32.671,10.87 32.671,18.977 32.719,19.025 U2.18
  Top Layer w0.813: P4.5 R12.1
  Bottom Layer w0.813: P4.5 R11.2
PB1: P4.4 R9.2 R10.1 U2.19 | length 47.8
  Top Layer w0.3: R10.1 5.271,10.085 6.591,8.765 15.166,8.765 19.369,4.562 27.002,4.562 33.219,10.779 U2.19
  Top Layer w0.813: P4.4 R10.1
  Bottom Layer w0.813: P4.4 R9.2
PB2: P4.3 R7.2 R8.1 U2.20 | length 47.7
  Top Layer w0.3: R8.1 5.271,7.545 6.644,6.172 6.669,6.198 17.094,6.198 19.182,4.11 27.19,4.11 33.716,10.636 33.716,15.996 33.719,15.999 U2.20@33.719,19.775
  Top Layer w0.813: P4.3 R8.1
  Bottom Layer w0.813: P4.3 R7.2
PB3: P5.11 R51.2 R52.1 U2.39 | length 24.9
  Top Layer w0.3: U2.39@34.719,27.875 34.719,28.904 35.858,30.043 41.102,30.043 44.372,26.774 48.349,26.774 49.796,28.22 R52.1
  Top Layer w0.813: R52.1 P5.11
  Bottom Layer w0.813: R51.2 P5.11
PB4: P5.12 R53.2 R54.1 U2.40 | length 25
  Top Layer w0.3: U2.40@34.219,27.875 34.219,29.044 35.671,30.495 41.361,30.495 42.713,29.144 48.179,29.144 49.796,30.76 R54.1
  Top Layer w0.813: R54.1 P5.12
  Bottom Layer w0.813: R53.2 P5.12
PB5: P5.13 R55.2 R56.1 U2.41 | length 25.5
  Top Layer w0.3: U2.41@33.719,27.875 33.719,29.183 35.484,30.947 42.276,30.947 43.043,31.715 48.211,31.715 49.796,33.3 R56.1
  Top Layer w0.813: R56.1 P5.13
  Bottom Layer w0.813: R55.2 P5.13
PB6: P5.14 R57.2 R58.1 U2.42 | length 27.7
  Top Layer w0.3: U2.42 33.219,29.322 35.296,31.399 42.022,31.399 42.761,32.139 42.761,33.134 43.967,34.341 48.296,34.341 49.796,35.84 R58.1
  Top Layer w0.813: R58.1 P5.14
  Bottom Layer w0.813: R57.2 P5.14
PB7: P5.15 R59.2 R60.1 U2.43 | length 30.4
  Top Layer w0.3: U2.43 32.719,29.462 35.109,31.852 41.793,31.852 42.309,32.367 42.309,35.273 43.993,36.957 48.347,36.957 49.796,38.406 R60.1
  Top Layer w0.813: R60.1@49.796,38.43 P5.15
  Bottom Layer w0.813: R59.2@49.796,38.43 P5.15
PB8: P5.16 R61.2 R62.1 U2.45 | length 33.5
  Top Layer w0.3: U2.45 31.719,30.035 33.988,32.304 41.606,32.304 41.849,32.547 41.849,36.608 44.715,39.474 48.349,39.474 49.796,40.92 R62.1
  Top Layer w0.813: R62.1 P5.16
  Bottom Layer w0.813: R61.2 P5.16
PB9: P4.14 R29.2 R30.1 U2.46 | length 36
  Top Layer w0.3: R30.1 5.271,35.485 6.593,34.163 10.744,34.163 12.598,32.309 28.411,32.309 31.219,29.5 U2.46
  Top Layer w0.813: P4.14 R30.1
  Bottom Layer w0.813: P4.14 R29.2
PB10: P4.2 R5.2 R6.1 U2.21 | length 48.1
  Top Layer w0.28: 34.219,18.804 34.987,18.036
  Top Layer w0.3: R6.1@5.271,5.005 6.618,3.658 27.377,3.658 34.168,10.449 34.168,15.808 34.171,15.811 34.171,16.315 34.987,17.131 34.987,18.036 ; 34.219,18.804 U2.21@34.219,19.775
  Top Layer w0.813: P4.2 5.221,5.055 R6.1@5.271,5.005
  Bottom Layer w0.813: P4.2 R5.2@5.221,5.055
PB11: P4.1 R3.2 R4.1 U2.22 | length 51.1
  Top Layer w0.254: U2.22 U2.22@34.728,19.766 ; U2.22@34.728,18.909 35.044,18.593
  Top Layer w0.26: 35.044,18.593 35.865,18.593 35.885,18.573
  Top Layer w0.28: U2.22@34.728,18.909 U2.22@34.728,19.766
  Top Layer w0.3: R4.1 5.271,2.465 6.212,1.524 9.169,1.524 9.566,1.127 10.373,1.127 12.395,3.15 27.508,3.15 34.62,10.262 34.62,15.621 36.465,17.465 36.465,17.993 35.885,18.573
  Top Layer w0.813: P4.1 R4.1
  Bottom Layer w0.813: P4.1 R3.2
PB12: P5.1 R31.2 R32.1 U2.25 | length 35.3
  Top Layer w0.3: U2.25 37.769,21.075 39.751,19.093 39.751,6.477 44.879,1.349 48.324,1.349 49.796,2.82 R32.1
  Top Layer w0.813: R32.1 P5.1
  Bottom Layer w0.813: R31.2 P5.1
PB13: P5.2 R33.2 R34.1 U2.26 | length 33.5
  Top Layer w0.3: U2.26@37.019,21.575 37.909,21.575 40.203,19.281 40.203,8.26 44.549,3.914 48.349,3.914 49.796,5.36 R34.1
  Top Layer w0.813: R34.1 P5.2
  Bottom Layer w0.813: R33.2 P5.2
PB14: P5.3 R35.2 R36.1 U2.27 | length 31.6
  Top Layer w0.3: U2.27@37.019,22.075 38.048,22.075 40.655,19.468 40.655,10.297 44.499,6.454 48.349,6.454 49.796,7.9 R36.1
  Top Layer w0.813: R36.1 P5.3
  Bottom Layer w0.813: R35.2 P5.3
PB15: P5.4 R37.2 R38.1 U2.28 | length 29.7
  Top Layer w0.3: U2.28@37.019,22.575 38.188,22.575 41.107,19.655 41.107,12.334 44.272,9.169 44.448,8.994 48.349,8.994 49.796,10.44 R38.1
  Top Layer w0.813: R38.1 P5.4
  Bottom Layer w0.813: R37.2 P5.4
SWCLK: P2.3 U2.37 | length 12
  Top Layer w0.3: v1(33.096,32.283) 33.096,35.23 P2.3 ; U2.37 35.719,28.625 36.089,28.995 36.358,28.995 v1(36.398,29.035)
  Bottom Layer w0.3: v1(33.096,32.283) 33.123,32.283 36.372,29.035 v1(36.398,29.035)
SWDIO: P2.2 U2.34 | length 16
  Top Layer w0.3: v1(36.322,32.868) 36.335,32.88 36.335,37.173 P2.2 ; U2.34 39.076,25.575 39.813,26.313 39.813,27.993 38.799,29.007 v1(37.744,29.007)
  Bottom Layer w0.3: v1(36.322,32.868) 37.744,31.445 v1(37.744,29.007)
pads on no net: U2.1 U2.2

## Polygon pours and split planes (outlines as drawn)
GND on Bottom Layer "GND_L04_P001" (solid, remove dead copper, pour order 1): 0,0 0,47.473 55.601,47.473 55.601,0
GND on Top Layer "GND_L01_P000" (solid, remove dead copper, pour order 0): 0,0 0,47.473 55.601,47.473 55.601,0
GND on GND_layer (split plane): 55.09,0.51 0.51,0.51 0.51,46.962 55.09,46.962
+3.3V on 3.3V_layer (split plane): 55.09,0.51 0.51,0.51 0.51,46.962 55.09,46.962

## Keep-outs
Keep-Out Layer:
  the board outline again, w0.813

## Silkscreen, mask and mechanical layers (free items; w line width, h text height)
Top Overlay:
  text "GND" at 4.059,45.402 h1.32
  text "PCB for ARM Cortex-M3" at 30.988,44.955 h1.62
  text "© Dimitris Exarchou" at 38.328,43.698 h1.02
  text "PB8" at 44.904,40.654 h1.32
  text "9V" at 4.059,38.873 h1.32
  text "PB7" at 44.919,38.089 h1.32
  text "PB6" at 44.907,35.56 h1.32
  text "PB9" at 8.036,35.163 h1.32
  text "3.3V" at 28.994,33.117 h1.32 r90
  text "GND" at 31.814,33.128 h1.32 r90
  text "GND" at 34.074,33.128 h1.32 r90
  text "3.3V" at 38.316,33.117 h1.32 r90
  text "PB5" at 44.92,33.014 h1.32
  text "PA0" at 8.036,32.624 h1.32
  text "Boot0" at 30.406,32.415 h1.32 r90
  text "SWCLK" at 35.486,31.629 h1.32 r90
  text "SWDIO" at 36.901,31.599 h1.32 r90
  text "PB4" at 44.892,30.453 h1.32
  text "PA1" at 8.036,30.067 h1.32
  text "PB3" at 44.921,27.922 h1.32
  text "PA2" at 8.036,27.527 h1.32
  text "PA3" at 44.922,25.376 h1.32
  text "PA3" at 8.036,25.005 h1.32
  text "PA2" at 44.903,22.812 h1.32
  text "PA4" at 8.036,22.45 h1.32
  text "PA11" at 44.239,20.266 h1.32
  text "PA5" at 8.036,19.925 h1.32
  text "PA10" at 44.215,17.737 h1.32
  text "PA6" at 8.036,17.385 h1.32
  text "PA9" at 44.924,15.19 h1.32
  text "PA7" at 8.036,14.828 h1.32
  text "PA8" at 44.905,12.646 h1.32
  text "PB0" at 8.036,12.305 h1.32
  text "PB15" at 44.222,10.099 h1.32
  text "PB1" at 8.036,9.748 h1.32
  text "PB14" at 44.194,7.538 h1.32
  text "PB2" at 8.036,7.209 h1.32
  text "PB13" at 44.223,5.007 h1.32
  text "PB10" at 8.036,4.686 h1.32
  text "PB12" at 44.204,2.443 h1.32
  text "PB11" at 8.036,2.129 h1.32